# Altium PCB MAGI'sBatteryPowerMega-Python.PcbDoc (part 1 of 3)
Units mil, origin at the board's own origin, x right, y up, seen from the top; angles counter-clockwise.
Board outline 6000 x 4000 mil, 2 copper layers (Top Layer, Bottom Layer); 34 components, 41 nets, 184 pads, 153 vias.
Unrouted connection lines stored in the file: 5.
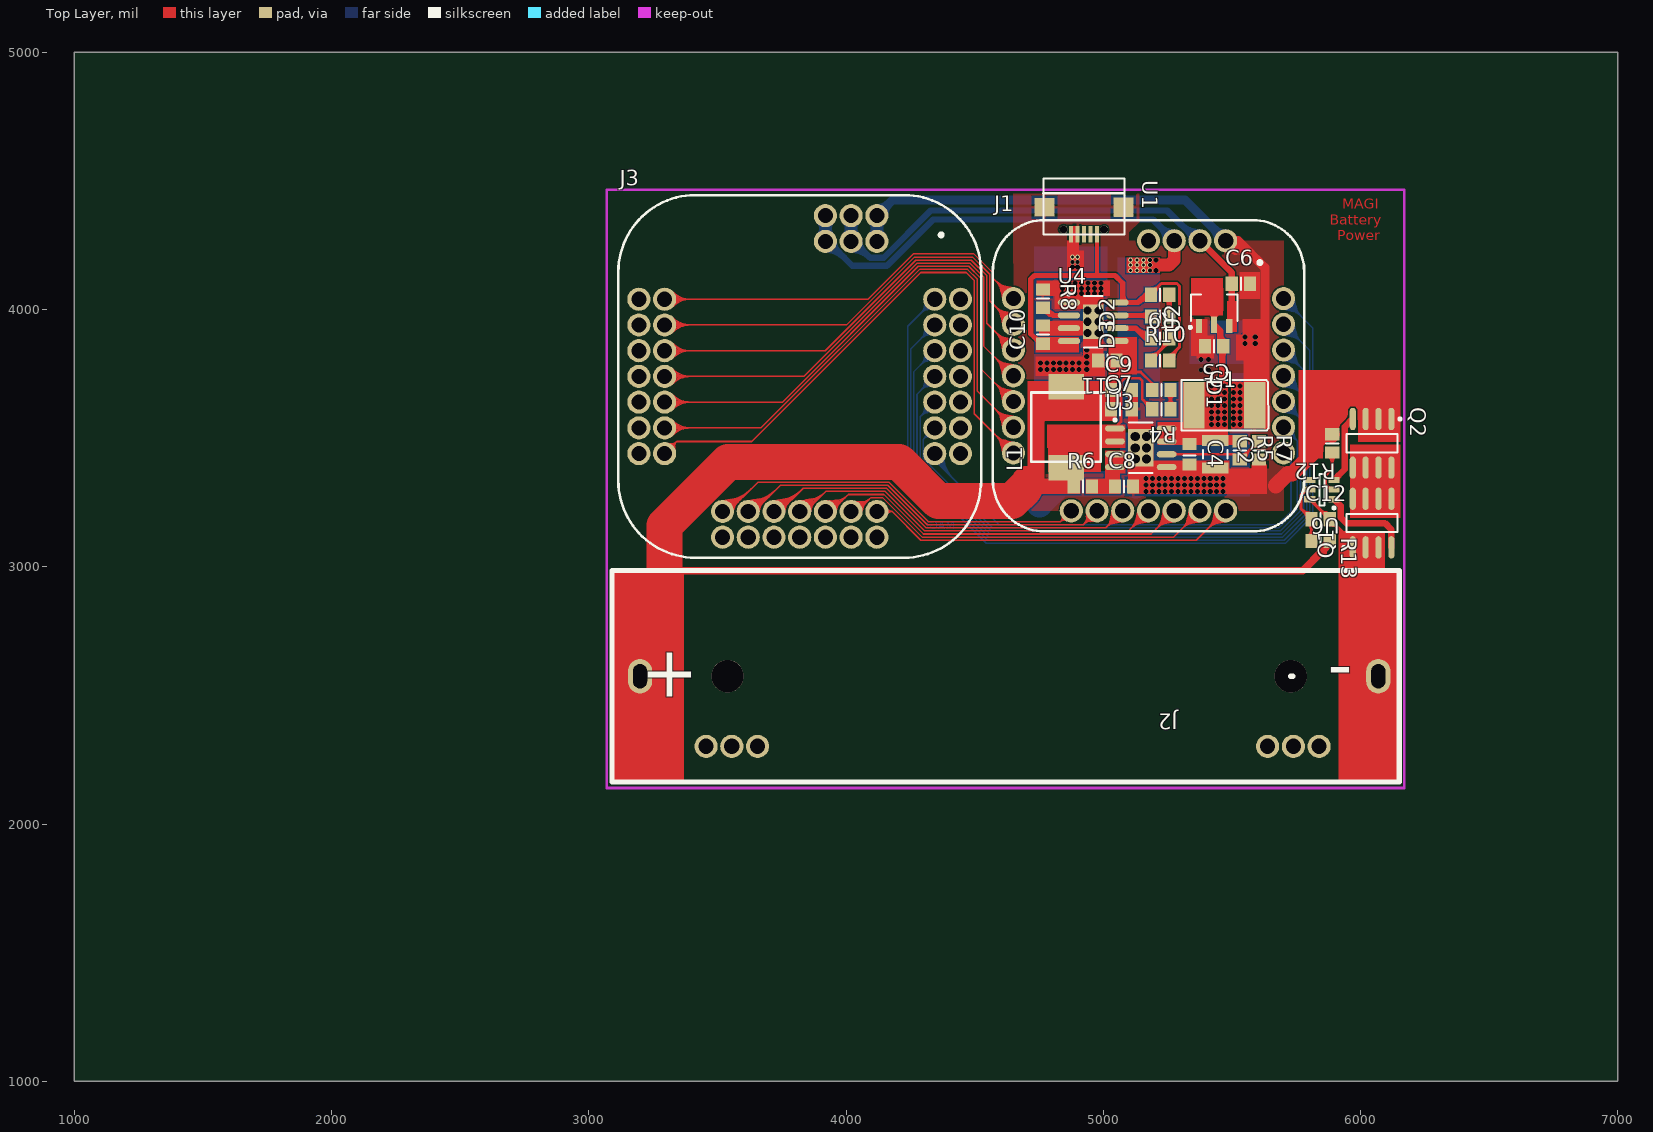
[diagram p0: Top Layer view]
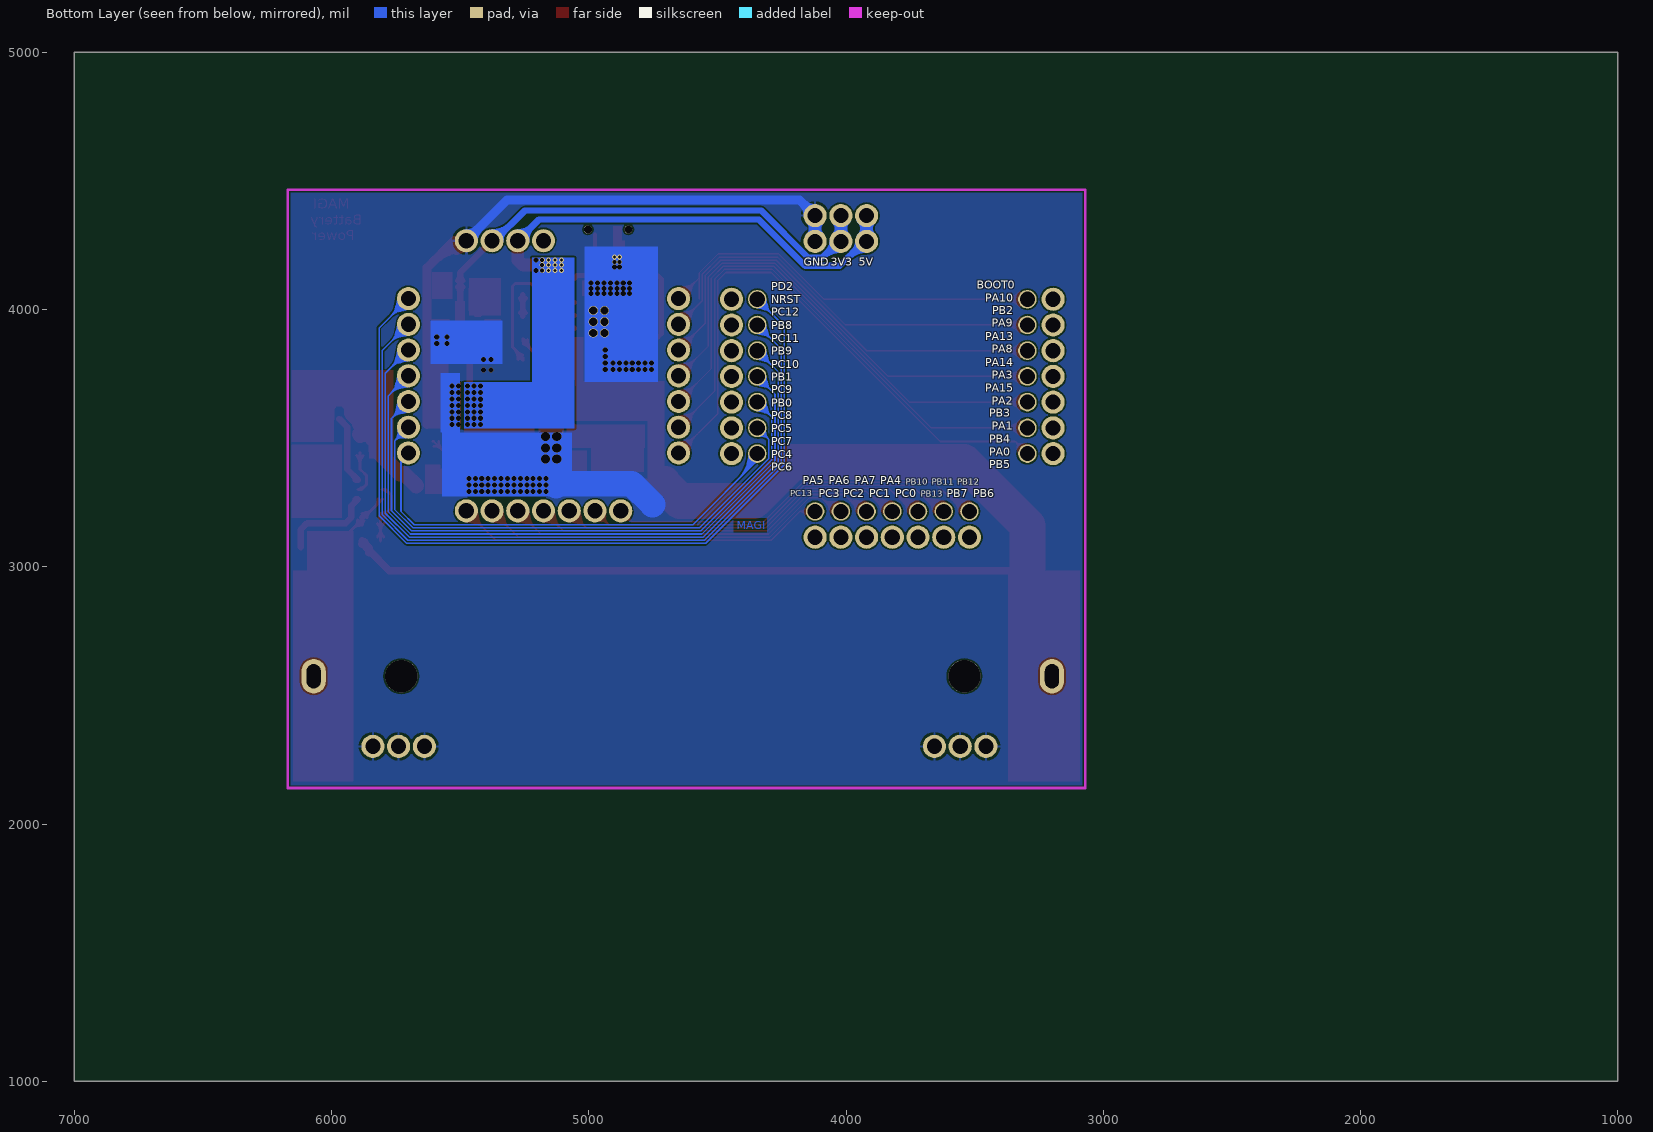
[diagram p1: Bottom Layer view, seen from below]

## Layer stack, top to bottom
Top Solder: solder mask 0.4, Solder Resist, Dk 3.5
Top Layer: signal copper 1.4
Dielectric1: dielectric 12.6, FR-4, Dk 4.8
Bottom Layer: signal copper 1.4
Bottom Solder: solder mask 0.4, Solder Resist, Dk 3.5

## Board outline
1000,1000 7000,1000 7000,5000 1000,5000

## Design rules (kind name [scope] priority, off if disabled: settings)
Clearance [All] p1: gap=6
PolygonConnect [All] p1: connectstyle=Relief reliefconductorwidth=10 reliefentries=4 polygonreliefangle="90 Angle" airgapwidth=10
RoutingVias [All] p1: holewidth=28 width=50 viastyle="Through Hole" minholewidth=28 minwidth=50 maxholewidth=28 maxwidth=50
SolderMaskExpansion [All] p1: expansion=4
Width [All] p1: maxlimit=200 minlimit=6 preferedwidth=30
29 further rules are at their usual default settings.

## Components (designator, comment, footprint, x,y, rotation, side; value= is the part's Value field where it differs from the comment)
C1 "TAN Cap" TAN-D-7343 5470.94,3627.44 r0 top
C2 "22uf" 14-1210 5435.94,3437.44 r270 top
C4 "10uf" 6-0805_N#1 5335.94,3432.44 r270 top
C5 "10uf" 6-0805_N#2 5430.94,3857.44 r180 top
C6 "10uf" 6-0805_N#2 5535,4100 r0 top
C7 "10uf" 6-0805_N#3 5065.94,3612.44 r0 top
C8 "1uf" 6-0805_N#2 5080.94,3312.44 r0 top
C9 "10uf" 6-0805_N#3 5065.94,3687.44 r0 top
C10 "10uf" 6-0805_N#2 4765.94,3902.44 r90 top
C11 "10uf" 6-0805_N#2 5015.94,3802.44 r180 top
C12 "10uf" 6-0805_N#2 5845,3185 r0 top
D1 "LED" 6-0805_N#2 5225.94,3687.44 r0 top
D2 "LED" 6-0805_N#2 5220.94,3972.44 r180 top
D3 "LED" 6-0805_N#2 5220.94,3887.44 r180 top
J1 "MAGI-M8" MAGI-M8 5175.94,3742.44 r0 top
J2 "CON2" 18650 5195,2565 r180 top
J3 "MAGIsBoard-Python" MAGIsBoard-Python 3820,3740 r0 top
L1 "INDUCTOR" 7*7 4845.94,3542.44 r90 top
Q1 "IRF7822" SO-8_N 6045,3170 r90 top
Q2 "IRF7822" SO-8_N 6045,3480 r270 top
R4 "1K" 6-0805_N#2 5225.94,3612.44 r180 top
R5 "316kΩ" 6-0805_N#2 5530.94,3452.44 r270 top
R6 "4.7" 6-0805_N#2 4920.94,3312.44 r0 top
R7 "100kΩ" 6-0805_N#2 5605.94,3452.44 r270 top
R8 "RPROG" 6-0805_N#2 4765.94,4042.44 r270 top
R9 "1K" 6-0805_N#2 5220.94,4057.44 r180 top
R10 "1K" 6-0805_N#2 5220.94,3802.44 r0 top
R12 "000" 6-0805_n 5890,3480 r270 top
R13 "000" 6-0805_n 5845,3100 r0 top
U1 "USB" MicroUSB 4925,4315 r0 top
U2 "HS7333" HS7333 5430.94,4007.44 r90 top
U3 "G5177B" G5177B 5145.94,3462.44 r0 top
U4 "TP4056" TP4056 4960.94,3952.44 r0 top
U6 "DW-01" TPS2513 5850,3300 r180 top

## Footprints (in the part's own frame and the unit in brackets; to place one, negate y for a bottom-side part, rotate by r counter-clockwise, add the part's x,y. Pads: shape width x height; smd on the part's side, far side on the other; paste and mask are expansions set on the pad)
6-0805_N#1 [mm] "Chip Resistor, Body 2.0x1.2mm, IPC Medium Density"
  rect 1.2x1.4 smd: 1(-1.143,0) 2(0.9,0)
  silkscreen extent 0,-0.6 0,0.6, body extent -1.07,-0.7 1.07,0.7, height 0.7
6-0805_N#2 [mm] "Chip Resistor, Body 2.0x1.2mm, IPC Medium Density"
  rect 1.2x1.4 smd: 1(-0.9,0) 2(0.9,0)
  silkscreen extent 0,-0.6 0,0.6, body extent -1.07,-0.7 1.07,0.7, height 0.7
6-0805_N#3 [mm] "Chip Resistor, Body 2.0x1.2mm, IPC Medium Density"
  rect 1.2x1.4 smd: 1(-0.9,0) 2(1.143,0)
  silkscreen extent 0,-0.6 0,0.6, body extent -1.07,-0.7 1.07,0.7, height 0.7
6-0805_n [mm] "Chip Resistor, Body 2.0x1.2mm, IPC Medium Density"
  rect 1.2x1.4 smd: 1(-0.9,0) 2(0.9,0)
  silkscreen extent 0,-0.6 0,0.6, body extent -1.07,-0.7 1.07,0.7, height 0.7
7*7 [mil]
  rect 98.43x137.8 smd: 1(-157.5,-10) 2(157.5,-10)
  silkscreen extent -135,-145 135,125
14-1210 [mm] "Chip Resistor, Body 3.2x2.5mm, IPC High Density"
  rect 1.1x2.6 smd: 1(-1.35,0) 2(1.35,0)
  silkscreen extent -0.4,-1.2 0.4,1.2, body extent -1.68,-1.32 1.68,1.32, height 0.9
18650 [mm]
  round 3.2 hole 3.2: 0(-13.56,-0.24) 0(42.05,-0.24)
  oval 2.4x3.4 hole 1.38 slot 2.4 at 90 deg: 1(50.69,-0.24) 2(-22.21,-0.24)
  silkscreen extent -24.28,-10.69 53.46,10.21
G5177B [mm]
  oval 1.95x0.6 smd: 1(-2.55,1.905) 2(-2.55,0.635) 3(-2.55,-0.635) 4(-2.55,-1.905) 5(2.55,-1.905) 6(2.55,-0.635) 7(2.55,0.635) 8(2.55,1.905)
  rect 2.55x3.71 smd: 9(0,0)
  silkscreen extent -2.67,-2.5 1.17,2.88, body extent -2,-2.5 2,2.5, height 1.65
HS7333 [mm] "SOT89, 3-Leads, Body 4.50x2.50mm, Pitch 1.50mm, Lead Span 4.1mm, IPC Medium Density"
  rect 1.4x0.6 smd: 1(-1.8,1.5) 3(-1.8,-1.5)
  rect 1.6x0.6 smd: 2(-1.7,0)
  Top Layer region: -0.9,0.3 -0.3,0.9 1.9,0.9 2.5,0.3 2.5,-0.3 1.9,-0.9 -0.3,-0.9 -0.9,-0.3
  silkscreen extent -2.07,-2.3 1.3,2.47, body extent -1.3,-2.3 1.3,2.3, height 1.6
MAGI-M8 [mil]
  round 90 hole 59.06: 1(300,525) 2(200,525) 3(100,525) 4(0,525) 8(-525,300) 9(-525,200) 10(-525,100) 11(-525,0) 12(-525,-100) 13(-525,-200) 14(-525,-300) 15(-300,-525) 16(-200,-525) 17(-100,-525) 18(0,-525) 19(100,-525) 20(200,-525) 21(300,-525) 22(525,-300) 23(525,-200) 24(525,-100) 25(525,0) 26(525,100) 27(525,200) 28(525,300)
  silkscreen extent -605,-605 605,430
MAGIsBoard-Python [mil]
  round 90 hole 59.06: 1(300,525) 1(300,625) 2(200,525) 2(200,625) 3(100,525) 3(100,625) 29(-625,300) 30(-625,200) 31(-625,100) 32(-625,0) 33(-625,-100) 34(-625,-200) 35(-625,-300) 36(-300,-625) 37(-200,-625) 38(-100,-625) 39(0,-625) 40(100,-625) 41(200,-625) 42(300,-625) 43(625,-300) 44(625,-200) 45(625,-100) 46(625,0) 47(625,100) 48(625,200) 49(625,300)
  round 90 / inner round 72 / far side round 72 hole 59.06: 8(-525,300) 9(-525,200) 10(-525,100) 11(-525,0) 12(-525,-100) 13(-525,-200) 14(-525,-300) 15(-300,-525) 16(-200,-525) 17(-100,-525) 18(0,-525) 19(100,-525) 20(200,-525) 21(300,-525) 22(525,-300) 23(525,-200) 24(525,-100) 25(525,0) 26(525,100) 27(525,200) 28(525,300)
  silkscreen extent -705,-705 705,705
MicroUSB [mm]
  round 0.8 hole 0.8: 0(-2,-0.1) 0(2,-0.1)
  rect 0.4x1.6 smd: 1(1.3,-0.576) 2(0.65,-0.576) 3(0,-0.576) 4(-0.65,-0.576) 5(-1.3,-0.576)
  rect 2x1.8 smd: 6(-3.9,2.1)
  rect 2x1.9 smd: 7(3.9,2.1)
  silkscreen extent -4,-0.58 4,4.92, body extent -4.1,-0.68 4.1,5.02, height 3
SO-8_N [mm] "SOIC, 8-Leads, Body 4.9x3.9mm, Pitch 1.27mm, IPC Medium Density"
  oval 2.2x0.6 smd: 1(-2.4,1.905) 2(-2.4,0.635) 3(-2.4,-0.635) 4(-2.4,-1.905) 5(2.4,-1.905) 6(2.4,-0.635) 7(2.4,0.635) 8(2.4,1.905)
  silkscreen extent -2.52,-2.5 0.9,2.88, body extent -2,-2.5 2,2.5, height 1.75
TAN-D-7343 [mm]
  rect 2.1x4.6 smd: 1(-3,0) 2(3,0)
  silkscreen extent -4.25,-2.5 4.34,2.5, body extent -3.65,-2.15 3.65,2.15, height 2.9
TP4056 [mm] "SOIC, 8-Leads, Body 4.90x3.90mm, Pitch 1.27mm, Thermal Pad 3.40.2x2.00.2mm, IPC Medium Density"
  oval 2.2x0.6 smd: 1(-2.4,1.905) 2(-2.4,0.635) 3(-2.4,-0.635) 4(-2.4,-1.905) 5(2.4,-1.905) 6(2.4,-0.635) 7(2.4,0.635) 8(2.4,1.905)
  rect 2x3.4 smd: 9(0,0)
  silkscreen extent -2.52,-2.55 0.9,2.88, body extent -2,-2.55 2,2.55, height 1.75
TPS2513 [mm]
  rect 1.1x0.6 smd: 1(-1.2,0.95) 2(-1.2,0) 3(-1.2,-0.95) 4(1.2,-0.95) 5(1.2,0) 6(1.2,0.95)
  silkscreen extent -1.33,-1.55 0.25,1.92, body extent -0.87,-1.52 0.87,1.53, height 1.45

## Part data
C1 C2 C4 C5 C6 C7 C8 C9 C10 C11 C12: library part "CAPACITOR POL", "Capacitor"
J2: "Connector"
Q1 Q2: "HEXFET Power MOSFET"
R4 R5 R6 R7 R8 R9 R10 R12 R13: library part RES1
U6: library part TPS2513

## Free pads (board coordinates)
  round 90 hole 59.06: 1(3456.1,2301.9) 2(3456.1,2301.9) 2(5639.06,2301.9) 3(3556.1,2301.9) 3(5739.06,2301.9) 4(3656.1,2301.9) 4(5839.06,2301.9)

## Via types
v1: diameter 19.68, hole 19.68, Top Layer to Bottom Layer, 125 vias
v2: diameter 19.68, hole 11.81, Top Layer to Bottom Layer, 11 vias
v3: diameter 35.43, hole 35.43, Top Layer to Bottom Layer, 6 vias
v4: diameter 35.43, hole 31.5, Top Layer to Bottom Layer, 6 vias
v5: diameter 19.68, hole 15.75, Top Layer to Bottom Layer, 5 vias

## Nets (pads, with @x,y where several pads share a name; then routed paths per layer and width w, separated by ;. In a path a pad name is that pad's centre, name@x,y a point inside that pad or via, vN(x,y) a via of type N, cw(c..) or ccw(c..) an arc to the next point about the centre after c; other vN are vias at no path point)
3.3V: C6.1 J1.2 J3.2 U2.3 | length 2623
  Top Layer w25: J1.2@5375.94,4267.44 5499.57,4143.82 C6.1@5499.57,4100 5499.57,4000.43 5505,3995 ; 5499.57,4069.21 cw(c5526.42,4069.21) 5507.43,4088.2 ccw(c5526.42,4069.21) 5499.57,4069.21 ; 5499.57,4069.21 ccw(c5472.72,4069.21) 5491.7,4088.2 cw(c5472.72,4069.21) 5499.57,4069.21 ; 5499.57,4130.79 cw(c5472.72,4130.79) 5491.7,4111.8 ccw(c5472.72,4130.79) 5499.57,4130.79 ; 5499.57,4130.79 ccw(c5526.42,4130.79) 5507.43,4111.8 cw(c5526.42,4130.79) 5499.57,4130.79
  Bottom Layer w25: J3.2@4020,4232.5 cw(c4020,4129.42) 4092.89,4202.31 ; J3.2@4020,4265 4030.2,4265 4093.7,4201.5 4146.3,4201.5 4329.8,4385 5248.19,4385 5365.75,4267.44 J1.2@5375.94,4267.44 ; J3.2@4052.5,4265 ccw(c4106.34,4265) 4068.27,4226.93 ; 5303.06,4330.13 ccw(c5375.94,4403.02) 5375.94,4299.94 cw(c5375.94,4403.02) 5303.06,4330.13 ; 5327.67,4305.51 cw(c5289.6,4267.44) 5343.44,4267.44 ccw(c5289.6,4267.44) 5327.67,4305.51
  Bottom Layer w50: J3.2@4005.86,4279.14 ccw(c3971.72,4313.28) 4020,4313.28 ccw(c4068.28,4313.28) J3.2@4034.14,4279.14 ; J3.2@4005.86,4350.86 cw(c3971.72,4316.72) 4020,4316.72 cw(c4068.28,4316.72) J3.2@4034.14,4350.86 ; J3.2@4020,4265 J3.2@4020,4365
5V: C1.1 C2.1 C4.1 C5.1 J1.3 J3.3 R5.1 U2.2 U3.7 U3.8 | length 5456.9
  Top Layer w12: 5420.94,3637.44 5420.94,3665.07 ; v1@5422.12,3681.1 ccw(c5425.21,3690.65) 5432.31,3683.55 ; v1@5424.6,3652.43 cw(c5434.16,3655.52) 5427.06,3662.62 ; 5434.64,3673.21 cw(c5440.02,3666.42) v1@5444.13,3674.06 ; 5435.03,3668.41 cw(c5445.09,3661.31) v1@5445.74,3673.6 ; 5437.18,3691.46 ccw(c5430.06,3701.23) v1@5442.11,3702.15 ; 5439.83,3691.08 ccw(c5432.73,3698.18) v1@5442.29,3701.26 ; v1@5443.75,3680.6 ccw(c5431.24,3698.63) 5452.84,3694.73 ; v1@5444.54,3681.02 ccw(c5436.51,3701.44) 5456.63,3692.68 ; 5454.29,3694.14 ccw(c5448.61,3715.34) v1@5467.62,3704.36 ; 5459.22,3693.74 cw(c5470.94,3682.02) v1@5470.94,3698.6 ; v1@5412.79,3651.25 cw(c5426.44,3651.25) 5416.79,3660.91 ; v1@5412.79,3651.25 cw(c5426.44,3651.25) 5416.79,3660.91 ; v1@5412.79,3651.25 cw(c5426.44,3651.25) 5416.79,3660.91 ; v1@5416.88,3670.37 ccw(c5422.48,3680.12) 5431.6,3673.54 ; v1@5416.88,3670.37 ccw(c5422.48,3680.12) 5431.6,3673.54 ; v1@5416.88,3670.37 ccw(c5422.48,3680.12) 5431.6,3673.54 ; v1@5416.88,3670.37 ccw(c5422.48,3680.12) 5431.6,3673.54 ; v1@5419.02,3654.58 ccw(c5408.05,3673.59) 5429.25,3667.91 ; v1@5419.02,3654.58 ccw(c5408.05,3673.59) 5429.25,3667.91 ; v1@5419.02,3654.58 ccw(c5408.05,3673.59) 5429.25,3667.91 ; v1@5420.35,3681.24 ccw(c5415.29,3713.51) v1@5443.58,3697.17 ; v1@5420.35,3681.24 ccw(c5415.29,3713.51) v1@5443.58,3697.17 ; v1@5420.35,3681.24 ccw(c5415.29,3713.51) v1@5443.58,3697.17 ; v1@5420.35,3681.24 ccw(c5415.29,3713.51) v1@5443.58,3697.17 ; v1@5420.35,3681.24 ccw(c5415.29,3713.51) v1@5443.58,3697.17 ; 5420.95,3665.07 cw(c5442.08,3643.94) v1@5445.5,3673.62 ; 5420.95,3665.07 cw(c5442.08,3643.94) v1@5445.5,3673.62 ; 5420.95,3665.07 cw(c5442.08,3643.94) v1@5445.5,3673.62 ; 5420.94,3665.07 5459.1,3703.23 ; v1@5420.94,3681.28 ccw(c5420.94,3697.56) 5432.45,3686.05 ; v1@5420.94,3681.28 ccw(c5420.94,3697.56) 5432.45,3686.05 ; v1@5420.94,3681.28 ccw(c5420.94,3720.43) 5448.63,3692.75 ; v1@5420.94,3681.28 ccw(c5420.94,3697.56) 5432.45,3686.05 ; v1@5420.94,3681.28 ccw(c5420.94,3697.56) 5432.45,3686.05 ; v1@5420.94,3681.28 ccw(c5420.94,3697.56) 5432.45,3686.05 ; v1@5420.94,3681.28 ccw(c5420.94,3720.43) 5448.63,3692.75 ; v1@5420.94,3681.28 ccw(c5420.94,3697.56) 5432.45,3686.05 ; v1@5420.94,3681.28 ccw(c5420.94,3720.43) 5448.63,3692.75 ; v1@5422.21,3669.38 ccw(c5420.29,3681.63) 5431.02,3675.43 ; v1@5422.21,3669.38 ccw(c5420.29,3681.63) 5431.02,3675.43 ; v1@5422.21,3669.38 ccw(c5420.29,3681.63) 5431.02,3675.43 ; v1@5422.21,3669.38 ccw(c5420.29,3681.63) 5431.02,3675.43 ; v1@5422.21,3669.38 ccw(c5420.29,3681.63) 5431.02,3675.43 ; v1@5422.86,3680.77 ccw(c5429.15,3691.73) v1@5439.39,3684.33 ; v1@5422.86,3680.77 ccw(c5429.15,3691.73) v1@5439.39,3684.33 ; v1@5422.86,3680.77 ccw(c5429.15,3691.73) v1@5439.39,3684.33 ; v1@5422.86,3680.77 ccw(c5429.15,3691.73) v1@5439.39,3684.33 ; v1@5423.5,3657.54 cw(c5452.24,3640.95) v1@5446.6,3673.65 ; v1@5423.5,3657.54 cw(c5452.24,3640.95) v1@5446.6,3673.65 ; v1@5423.5,3657.54 cw(c5452.24,3640.95) v1@5446.6,3673.65 ; v1@5423.5,3657.54 cw(c5452.24,3640.95) v1@5446.6,3673.65 ; v1@5424.27,3675.52 cw(c5443.28,3664.55) 5437.6,3685.75 ; v1@5424.27,3675.52 cw(c5443.28,3664.55) 5437.6,3685.75 ; v1@5424.27,3675.52 cw(c5443.28,3664.55) 5437.6,3685.75 ; v1@5424.79,3651.25 cw(c5467.41,3651.25) v1@5437.27,3681.4 ; v1@5424.79,3651.25 cw(c5443.08,3651.25) 5430.14,3664.19 ; v1@5424.79,3651.25 cw(c5443.08,3651.25) 5430.14,3664.19 ; v1@5424.79,3651.25 cw(c5443.08,3651.25) 5430.14,3664.19 ; v1@5424.79,3651.25 cw(c5443.08,3651.25) 5430.14,3664.19 ; v1@5424.79,3651.25 cw(c5467.41,3651.25) v1@5437.27,3681.4 ; v1@5424.79,3651.25 cw(c5443.08,3651.25) 5430.14,3664.19 ; v1@5424.79,3651.25 cw(c5443.08,3651.25) 5430.14,3664.19 ; v1@5424.79,3651.25 cw(c5467.41,3651.25) v1@5437.27,3681.4 ; v1@5426.21,3679.81 ccw(c5409.88,3708.1) v1@5442.15,3703.04 ; v1@5426.21,3679.81 ccw(c5409.88,3708.1) v1@5442.15,3703.04 ; v1@5426.21,3679.81 ccw(c5409.88,3708.1) v1@5442.15,3703.04 ; v1@5426.21,3679.81 ccw(c5409.88,3708.1) v1@5442.15,3703.04 ; v1@5428.45,3671.1 ccw(c5425.24,3692.81) v1@5442.86,3679.73 ; v1@5428.45,3671.1 ccw(c5425.24,3692.81) v1@5442.86,3679.73 ; v1@5428.45,3671.1 ccw(c5425.24,3692.81) v1@5442.86,3679.73 ; v1@5428.63,3672.02 cw(c5437.31,3665.65) v1@5443.68,3674.34 ; v1@5428.63,3672.02 cw(c5437.31,3665.65) v1@5443.68,3674.34 ; v1@5428.63,3672.02 cw(c5437.31,3665.65) v1@5443.68,3674.34 ; v1@5428.63,3672.02 cw(c5437.31,3665.65) v1@5443.68,3674.34 ; 5430.64,3674.76 ccw(c5402.96,3702.44) v1@5442.1,3702.44 ; 5430.64,3674.76 ccw(c5402.96,3702.44) v1@5442.1,3702.44 ; 5430.64,3674.76 ccw(c5402.96,3702.44) v1@5442.1,3702.44 ; 5430.95,3666.42 ccw(c5421.74,3686.35) v1@5442.34,3678.77 ; 5430.95,3666.42 ccw(c5421.74,3686.35) v1@5442.34,3678.77 ; 5430.95,3666.42 ccw(c5421.74,3686.35) v1@5442.34,3678.77 ; 5435.16,3687.27 cw(c5455.23,3678.38) v1@5447.33,3698.86 ; 5435.16,3687.27 cw(c5455.23,3678.38) v1@5447.33,3698.86 ; 5435.16,3687.27 cw(c5455.23,3678.38) v1@5447.33,3698.86 ; 5435.72,3681.7 cw(c5444.4,3675.34) v1@5450.76,3684.02 ; 5435.72,3681.7 cw(c5444.4,3675.34) v1@5450.76,3684.02 ; 5435.72,3681.7 cw(c5444.4,3675.34) v1@5450.76,3684.02 ; 5435.72,3681.7 cw(c5444.4,3675.34) v1@5450.76,3684.02 ; 5436.31,3679.73 cw(c5446.57,3673.8) v1@5444.56,3685.48 ; 5436.31,3679.73 cw(c5446.57,3673.8) v1@5444.56,3685.48 ; 5436.31,3679.73 cw(c5446.57,3673.8) v1@5444.56,3685.48 ; 5436.31,3679.73 cw(c5446.57,3673.8) v1@5444.56,3685.48 ; 5437.64,3685.79 cw(c5458.84,3680.11) v1@5447.87,3699.11 ; 5437.64,3685.79 cw(c5458.84,3680.11) v1@5447.87,3699.11 ; 5437.64,3685.79 cw(c5458.84,3680.11) v1@5447.87,3699.11 ; v1@5437.88,3678.65 cw(c5450.24,3676.8) 5443.99,3687.62 ; v1@5437.88,3678.65 cw(c5450.24,3676.8) 5443.99,3687.62 ; v1@5437.88,3678.65 cw(c5450.24,3676.8) 5443.99,3687.62 ; v1@5439.36,3672.62 cw(c5448.05,3678.98) 5441.69,3687.66 ; v1@5439.36,3672.62 cw(c5448.05,3678.98) 5441.69,3687.66 ; v1@5439.36,3672.62 cw(c5448.05,3678.98) 5441.69,3687.66 ; v1@5439.36,3672.62 cw(c5448.05,3678.98) 5441.69,3687.66 ; v1@5440.05,3684.93 ccw(c5433.43,3694.02) v1@5442.76,3700.3 ; v1@5440.05,3684.93 ccw(c5433.43,3694.02) v1@5442.76,3700.3 ; v1@5440.05,3684.93 ccw(c5433.43,3694.02) v1@5442.76,3700.3 ; v1@5442.1,3702.44 cw(c5425.83,3702.44) 5437.34,3690.93 ccw(c5425.83,3702.44) v1@5442.1,3702.44 ; 5447.96,3692.36 ccw(c5441.76,3703.1) v1@5454,3701.18 ; 5447.96,3692.36 ccw(c5441.76,3703.1) v1@5454,3701.18 ; 5447.96,3692.36 ccw(c5441.76,3703.1) v1@5454,3701.18 ; 5447.96,3692.36 ccw(c5441.76,3703.1) v1@5454,3701.18 ; v1@5449.05,3679.71 cw(c5457.73,3686.07) v1@5451.37,3694.76 ; v1@5449.05,3679.71 cw(c5457.73,3686.07) v1@5451.37,3694.76 ; v1@5449.05,3679.71 cw(c5457.73,3686.07) v1@5451.37,3694.76 ; v1@5449.05,3679.71 cw(c5457.73,3686.07) v1@5451.37,3694.76 ; v1@5449.74,3676.87 cw(c5481.71,3672.08) v1@5465.55,3700.07 ; v1@5449.74,3676.87 cw(c5481.71,3672.08) v1@5465.55,3700.07 ; v1@5449.74,3676.87 cw(c5481.71,3672.08) v1@5465.55,3700.07 ; 5450.12,3692.26 ccw(c5443.77,3700.98) v1@5452.71,3706.99 ; 5450.12,3692.26 ccw(c5443.77,3700.98) v1@5452.71,3706.99 ; 5450.12,3692.26 ccw(c5443.77,3700.98) v1@5452.71,3706.99 ; 5459.1,3703.23 ccw(c5481.89,3680.44) 5449.77,3677.76 cw(c5481.89,3680.44) 5459.1,3703.23 ; v1@5470.94,3698.6 ccw(c5470.94,3658.84) 5442.83,3686.95 cw(c5470.94,3658.84) v1@5470.94,3698.6 ; v1@5424.53,3676.06 cw(c5445.01,3668.16) 5436.11,3688.23 ccw(c5445.01,3668.16) v1@5424.53,3676.06
  Top Layer w25: U2.2@5430.94,3940.51 5455.69,3915.77 5455.69,3889.01 ; 5458.01,3701.67 ccw(c5466.98,3717.22) 5471.63,3699.87 cw(c5467.28,3716.13) 5458.86,3701.56 ; 5455.69,3889.01 ccw(c5472.97,3889.01) C5.1@5468.96,3872.2 ; 5455.69,3889.01 cw(c5444.15,3877.47) C5.1@5457.37,3867.9 ; 5455.69,3889.01 ccw(c5472.97,3889.01) C5.1@5468.96,3872.2 ; 5455.69,3889.01 cw(c5444.15,3877.47) C5.1@5457.37,3867.9 ; 5455.69,3889.01 cw(c5444.15,3877.47) C5.1@5457.37,3867.9 ; 5455.69,3889.01 ccw(c5472.97,3889.01) C5.1@5468.96,3872.2 ; 5455.69,3889.01 5466.38,3878.32 C5.1@5466.38,3857.44 5463.39,3854.45 v1@5463.39,3698.94 ; v1@5463.39,3698.94 ccw(c5448.2,3683.76) 5445.63,3705.08 cw(c5448.2,3683.76) v1@5463.39,3698.94 ; v1@5463.39,3698.94 v1@5464.29,3698.04 ; 5463.39,3819.43 cw(c5500.45,3819.43) C5.1@5474.24,3845.64 ; 5463.39,3819.43 cw(c5500.45,3819.43) C5.1@5474.24,3845.64 ; 5463.39,3819.43 cw(c5500.45,3819.43) C5.1@5474.24,3845.64 ; v1@5464.29,3698.04 ccw(c5447.16,3680.91) 5445.79,3705.09 cw(c5447.16,3680.91) v1@5464.29,3698.04 ; v1@5465.62,3696.71 cw(c5446.35,3677.44) v1@5473.6,3677.44 ; v1@5465.62,3696.71 cw(c5446.35,3677.44) v1@5473.6,3677.44 ; v1@5465.62,3696.71 cw(c5446.35,3677.44) v1@5473.6,3677.44 ; v1@5465.62,3696.71 cw(c5446.35,3677.44) v1@5473.6,3677.44 ; 5463.39,3714.27 ccw(c5482.78,3714.27) 5469.07,3700.56 cw(c5482.78,3714.27) 5463.39,3714.27 ; v1@5468.38,3703.13 ccw(c5486.84,3698.18) 5470.29,3688.63 cw(c5486.84,3698.18) v1@5468.38,3703.13
  Top Layer w50: v5(5180.94,4172.44) 5255.94,4172.44 5275.94,4192.44 J1.3@5275.94,4267.44
  Bottom Layer w25: J3.3@3920,4232.5 cw(c3920,4129.42) 3992.89,4202.31 ; J3.3@3920,4265 3930.2,4265 4024.7,4170.5 4159.14,4170.5 4338.64,4350 5193.39,4350 J1.3@5275.94,4267.44 ; J3.3@3952.5,4265 ccw(c4006.34,4265) 3968.27,4226.93 ; 5220.46,4322.92 cw(c5164.98,4267.44) 5243.44,4267.44 ccw(c5164.98,4267.44) 5220.46,4322.92 ; 5220.46,4322.92 ccw(c5275.94,4378.4) 5275.94,4299.94 cw(c5275.94,4378.4) 5220.46,4322.92
  Bottom Layer w50: J3.3@3905.86,4279.14 ccw(c3871.72,4313.28) 3920,4313.28 ccw(c3968.28,4313.28) J3.3@3934.14,4279.14 ; J3.3@3905.86,4350.86 cw(c3871.72,4316.72) 3920,4316.72 cw(c3968.28,4316.72) J3.3@3934.14,4350.86 ; J3.3@3920,4265 J3.3@3920,4365
  other v1: 5420.94,3552.44 5445.94,3552.44 5470.94,3552.44 5420.94,3577.44 5445.94,3577.44 5470.94,3577.44 5420.94,3602.44 5445.94,3602.44 5470.94,3602.44 5420.94,3627.44 5445.94,3627.44 5470.94,3627.44 5420.94,3651.25 5445.94,3652.44 5470.94,3652.44 5420.94,3677.44 5445.94,3677.44 5470.94,3677.44 5420.94,3702.44 5445.94,3702.44 5470.94,3702.44 5205.94,4152.44 5205.94,4192.44
  other v2: 5105.94,4152.44 5130.94,4152.44 5155.94,4152.44 5105.94,4172.44 5130.94,4172.44 5155.94,4172.44 5105.94,4192.44 5130.94,4192.44 5155.94,4192.44
  other v5: 5180.94,4152.44 5180.94,4192.44
A0: J1.22 J3.22 | length 2337.5
  Bottom Layer w6: J3.22@4342,3440 ccw(c4398.41,3440) 4358.52,3400.11 ; J3.22@4345,3407 cw(c4345,3390.99) 4356.32,3402.31 ; J3.22@4345,3440 4345,3413.63 4595.19,3163.44 5678.44,3163.44 5730,3215 5730,3413.39 J1.22@5700.94,3442.44 ; J3.22@4348,3440 ccw(c4418.9,3440) 4368.77,3389.87 ; J3.22@4354,3440 ccw(c4439.38,3440) 4379.01,3379.62 ; J3.22@4360,3440 ccw(c4459.87,3440) 4389.25,3369.38 ; J3.22@4366,3440 ccw(c4480.36,3440) 4399.49,3359.14 ; J3.22@4372,3440 ccw(c4500.84,3440) 4409.74,3348.9 ; J3.22@4378,3440 ccw(c4521.33,3440) 4419.98,3338.65
A1: J1.23 J3.23 | length 2997.8
  Bottom Layer w6: J3.23@4345,3540 4300,3495 ; J1.23@5700.94,3542.44 5754.94,3488.44 ; 4300,3495 cw(c4331.72,3463.28) 4339.37,3507.48 ccw(c4331.72,3463.28) 4300,3495 ; 4300,3495 ccw(c4268.28,3526.72) 4312.48,3534.37 cw(c4268.28,3526.72) 4300,3495 ; 4300,3495 4300,3421.36 4569.92,3151.44 5683.41,3151.44 5754.94,3222.97 5754.94,3488.44 ; 4308.18,3503.18 cw(c4334.14,3477.23) 4340.4,3513.4 ccw(c4334.14,3477.23) 4308.18,3503.18 ; 4308.18,3503.18 ccw(c4282.23,3529.14) 4318.4,3535.4 cw(c4282.23,3529.14) 4308.18,3503.18 ; 4316.37,3511.37 cw(c4336.55,3491.18) 4341.42,3519.31 ccw(c4336.55,3491.18) 4316.37,3511.37 ; 4316.37,3511.37 ccw(c4296.18,3531.55) 4324.31,3536.42 cw(c4296.18,3531.55) 4316.37,3511.37 ; 5739.51,3503.87 cw(c5763.97,3528.33) 5730.22,3535.89 ccw(c5763.97,3528.33) 5739.51,3503.87 ; 5739.51,3503.87 ccw(c5715.06,3479.41) 5707.5,3513.17 cw(c5715.06,3479.41) 5739.51,3503.87 ; 5747.23,3496.16 cw(c5776.58,3525.51) 5736.08,3534.58 ccw(c5776.58,3525.51) 5747.23,3496.16 ; 5747.23,3496.16 ccw(c5717.88,3466.81) 5708.81,3507.31 cw(c5717.88,3466.81) 5747.23,3496.16 ; 5754.94,3488.44 cw(c5789.18,3522.68) 5741.93,3533.26 ccw(c5789.18,3522.68) 5754.94,3488.44 ; 5754.94,3488.44 ccw(c5720.7,3454.2) 5710.12,3501.46 cw(c5720.7,3454.2) 5754.94,3488.44
A2: J1.24 J3.24 | length 4760.2
  Bottom Layer w6: 4302.27,3602.33 cw(c4356.38,3588.35) J3.24@4344.35,3642.93 ; 4304.71,3611.79 cw(c4354.02,3599.05) J3.24@4343.06,3648.79 ; 4307.16,3621.26 cw(c4351.66,3609.76) J3.24@4341.77,3654.65 ; 4307.33,3597.27 ccw(c4293.35,3651.38) J3.24@4347.93,3639.35 ; 4309.6,3630.72 cw(c4349.3,3620.46) J3.24@4340.48,3660.51 ; 4316.79,3599.71 ccw(c4304.05,3649.02) J3.24@4353.79,3638.06 ; 4326.26,3602.16 ccw(c4314.76,3646.66) J3.24@4359.65,3636.77 ; 4335.72,3604.6 ccw(c4325.46,3644.3) J3.24@4365.51,3635.48 ; J3.24@4345,3640 4288,3583 4288,3416.39 4564.95,3139.44 5688.38,3139.44 5766.94,3218 5766.94,3576.44 ; J1.24@5678.45,3634.07 ccw(c5733.94,3654.72) 5722.09,3596.72 ; J1.24@5684.08,3636.16 ccw(c5745.88,3659.17) 5732.68,3594.55 ; J1.24@5689.7,3638.26 ccw(c5757.83,3663.61) 5743.28,3592.39 ; J1.24@5700.94,3642.44 5766.94,3576.44 ; J1.24@5705.13,3653.69 cw(c5679.77,3585.56) 5751,3600.11 ; J1.24@5707.22,3659.31 cw(c5684.22,3597.5) 5748.83,3610.7 ; J1.24@5709.32,3664.93 cw(c5688.67,3609.45) 5746.67,3621.3 ; 4288.67,3583.67 cw(c4345,3527.33) 4345,3607 ccw(c4345,3527.33) 4288.67,3583.67 ; 4288.67,3583.67 ccw(c4232.33,3640) 4312,3640 cw(c4232.33,3640) 4288.67,3583.67 ; 4298.91,3593.91 cw(c4345,3547.82) 4345,3613 ccw(c4345,3547.82) 4298.91,3593.91 ; 4298.91,3593.91 ccw(c4252.82,3640) 4318,3640 cw(c4252.82,3640) 4298.91,3593.91 ; 4309.15,3604.15 cw(c4345,3568.3) 4345,3619 ccw(c4345,3568.3) 4309.15,3604.15 ; 4309.15,3604.15 ccw(c4273.3,3640) 4324,3640 cw(c4273.3,3640) 4309.15,3604.15 ; 4319.39,3614.39 cw(c4345,3588.79) 4345,3625 ccw(c4345,3588.79) 4319.39,3614.39 ; 4319.39,3614.39 ccw(c4293.79,3640) 4330,3640 cw(c4293.79,3640) 4319.39,3614.39 ; 5738.66,3604.73 cw(c5772.08,3638.15) 5724.9,3640.99 ccw(c5772.08,3638.15) 5738.66,3604.73 ; 5738.66,3604.73 ccw(c5705.24,3571.31) 5702.39,3618.48 cw(c5705.24,3571.31) 5738.66,3604.73 ; 5748.09,3595.3 cw(c5789.86,3637.07) 5730.89,3640.63 ccw(c5789.86,3637.07) 5748.09,3595.3 ; 5748.09,3595.3 ccw(c5706.31,3553.53) 5702.75,3612.5 cw(c5706.31,3553.53) 5748.09,3595.3 ; 5757.51,3585.87 cw(c5807.64,3636) 5736.88,3640.27 ccw(c5807.64,3636) 5757.51,3585.87 ; 5757.51,3585.87 ccw(c5707.39,3535.74) 5703.11,3606.51 cw(c5707.39,3535.74) 5757.51,3585.87 ; 5766.94,3576.44 cw(c5825.42,3634.93) 5742.87,3639.91 ccw(c5825.42,3634.93) 5766.94,3576.44 ; 5766.94,3576.44 ccw(c5708.46,3517.96) 5703.48,3600.52 cw(c5708.46,3517.96) 5766.94,3576.44
A3: J1.25 J3.25 | length 5613.6
  Bottom Layer w6: 4302.27,3702.33 cw(c4356.38,3688.35) J3.25@4344.35,3742.93 ; 4304.71,3711.79 cw(c4354.02,3699.05) J3.25@4343.06,3748.79 ; 4307.16,3721.26 cw(c4351.66,3709.76) J3.25@4341.77,3754.65 ; 4307.33,3697.27 ccw(c4293.35,3751.38) J3.25@4347.93,3739.35 ; 4309.6,3730.72 cw(c4349.3,3720.46) J3.25@4340.48,3760.51 ; 4316.79,3699.71 ccw(c4304.05,3749.02) J3.25@4353.79,3738.06 ; 4326.26,3702.16 ccw(c4314.76,3746.66) J3.25@4359.65,3736.77 ; 4335.72,3704.6 ccw(c4325.46,3744.3) J3.25@4365.51,3735.48 ; J3.25@4345,3740 4276,3671 4276,3411.42 4559.98,3127.44 5693.35,3127.44 5778.94,3213.03 5778.94,3664.44 J1.25@5700.94,3742.44 ; J1.25@5672.31,3733.48 ccw(c5721.75,3748.95) 5710.85,3698.31 ; J1.25@5678.04,3735.27 ccw(c5733.04,3752.48) 5720.92,3696.14 ; J1.25@5683.77,3737.07 ccw(c5744.33,3756.01) 5730.98,3693.98 ; J1.25@5689.04,3740.91 ccw(c5737.37,3747.13) 5724.76,3700.06 ; J1.25@5689.49,3738.86 ccw(c5755.61,3759.55) 5741.04,3691.81 ; J1.25@5694.99,3741.68 ccw(c5746.97,3748.36) 5733.41,3697.74 ; J1.25@5701.71,3748.39 cw(c5695.02,3696.42) 5745.64,3709.98 ; J1.25@5702.48,3754.34 cw(c5696.26,3706.01) 5743.33,3718.63 ; J1.25@5704.53,3753.89 cw(c5683.84,3687.77) 5751.57,3702.35 ; J1.25@5706.32,3759.62 cw(c5687.37,3699.06) 5749.41,3712.41 ; J1.25@5708.11,3765.35 cw(c5690.9,3710.35) 5747.24,3722.47 ; J1.25@5709.9,3771.07 cw(c5694.44,3721.63) 5745.08,3732.53 ; 5742.05,3695.43 cw(c5756.57,3749.6) J1.25@5700.94,3742.44 ; 5747.96,3701.33 ccw(c5693.79,3686.82) J1.25@5700.94,3742.44 ; 4288.67,3683.67 cw(c4345,3627.33) 4345,3707 ccw(c4345,3627.33) 4288.67,3683.67 ; 4288.67,3683.67 ccw(c4232.33,3740) 4312,3740 cw(c4232.33,3740) 4288.67,3683.67 ; 4298.91,3693.91 cw(c4345,3647.82) 4345,3713 ccw(c4345,3647.82) 4298.91,3693.91 ; 4298.91,3693.91 ccw(c4252.82,3740) 4318,3740 cw(c4252.82,3740) 4298.91,3693.91 ; 4309.15,3704.15 cw(c4345,3668.3) 4345,3719 ccw(c4345,3668.3) 4309.15,3704.15 ; 4309.15,3704.15 ccw(c4273.3,3740) 4324,3740 cw(c4273.3,3740) 4309.15,3704.15 ; 4319.39,3714.39 cw(c4345,3688.79) 4345,3725 ccw(c4345,3688.79) 4319.39,3714.39 ; 4319.39,3714.39 ccw(c4293.79,3740) 4330,3740 cw(c4293.79,3740) 4319.39,3714.39 ; 5741.92,3701.47 cw(c5782.89,3742.44) 5724.94,3742.44 ccw(c5782.89,3742.44) 5741.92,3701.47 ; 5741.92,3701.47 ccw(c5700.94,3660.5) 5700.94,3718.44 cw(c5700.94,3660.5) 5741.92,3701.47 ; 5752.16,3691.23 cw(c5803.37,3742.44) 5730.94,3742.44 ccw(c5803.37,3742.44) 5752.16,3691.23 ; 5752.16,3691.23 ccw(c5700.94,3640.01) 5700.94,3712.44 cw(c5700.94,3640.01) 5752.16,3691.23 ; 5762.4,3680.99 cw(c5823.86,3742.44) 5736.94,3742.44 ccw(c5823.86,3742.44) 5762.4,3680.99 ; 5762.4,3680.99 ccw(c5700.94,3619.53) 5700.94,3706.44 cw(c5700.94,3619.53) 5762.4,3680.99 ; 5772.64,3670.74 cw(c5844.34,3742.44) 5742.94,3742.44 ccw(c5844.34,3742.44) 5772.64,3670.74 ; 5772.64,3670.74 ccw(c5700.94,3599.04) 5700.94,3700.44 cw(c5700.94,3599.04) 5772.64,3670.74
A4: J1.26 J3.26 | length 5863.3
  Bottom Layer w6: 4302.27,3802.33 cw(c4356.38,3788.35) J3.26@4344.35,3842.93 ; 4304.71,3811.79 cw(c4354.02,3799.05) J3.26@4343.06,3848.79 ; 4307.16,3821.26 cw(c4351.66,3809.76) J3.26@4341.77,3854.65 ; 4307.33,3797.27 ccw(c4293.35,3851.38) J3.26@4347.93,3839.35 ; 4309.6,3830.72 cw(c4349.3,3820.46) J3.26@4340.48,3860.51 ; 4316.79,3799.71 ccw(c4304.05,3849.02) J3.26@4353.79,3838.06 ; 4326.26,3802.16 ccw(c4314.76,3846.66) J3.26@4359.65,3836.77 ; 4335.72,3804.6 ccw(c4325.46,3844.3) J3.26@4365.51,3835.48 ; J3.26@4345,3840 4264,3759 4264,3406.45 4555.01,3115.44 5698.32,3115.44 5790.94,3208.06 5790.94,3752.44 J1.26@5700.94,3842.44 ; J1.26@5672.31,3833.48 ccw(c5721.75,3848.95) 5710.85,3798.31 ; J1.26@5678.04,3835.27 ccw(c5733.04,3852.48) 5720.92,3796.14 ; J1.26@5683.77,3837.07 ccw(c5744.33,3856.01) 5730.98,3793.98 ; J1.26@5689.04,3840.91 ccw(c5737.37,3847.13) 5724.76,3800.06 ; J1.26@5689.49,3838.86 ccw(c5755.61,3859.55) 5741.04,3791.81 ; J1.26@5694.99,3841.68 ccw(c5746.97,3848.36) 5733.41,3797.74 ; J1.26@5701.71,3848.39 cw(c5695.02,3796.42) 5745.64,3809.98 ; J1.26@5702.48,3854.34 cw(c5696.26,3806.01) 5743.33,3818.63 ; J1.26@5704.53,3853.89 cw(c5683.84,3787.77) 5751.57,3802.35 ; J1.26@5706.32,3859.62 cw(c5687.37,3799.06) 5749.41,3812.41 ; J1.26@5708.11,3865.35 cw(c5690.9,3810.35) 5747.24,3822.47 ; J1.26@5709.9,3871.07 cw(c5694.44,3821.63) 5745.08,3832.53 ; 5742.05,3795.43 cw(c5756.57,3849.6) J1.26@5700.94,3842.44 ; 5747.96,3801.33 ccw(c5693.79,3786.82) J1.26@5700.94,3842.44 ; 4288.67,3783.67 cw(c4345,3727.33) 4345,3807 ccw(c4345,3727.33) 4288.67,3783.67 ; 4288.67,3783.67 ccw(c4232.33,3840) 4312,3840 cw(c4232.33,3840) 4288.67,3783.67 ; 4298.91,3793.91 cw(c4345,3747.82) 4345,3813 ccw(c4345,3747.82) 4298.91,3793.91 ; 4298.91,3793.91 ccw(c4252.82,3840) 4318,3840 cw(c4252.82,3840) 4298.91,3793.91 ; 4309.15,3804.15 cw(c4345,3768.3) 4345,3819 ccw(c4345,3768.3) 4309.15,3804.15 ; 4309.15,3804.15 ccw(c4273.3,3840) 4324,3840 cw(c4273.3,3840) 4309.15,3804.15 ; 4319.39,3814.39 cw(c4345,3788.79) 4345,3825 ccw(c4345,3788.79) 4319.39,3814.39 ; 4319.39,3814.39 ccw(c4293.79,3840) 4330,3840 cw(c4293.79,3840) 4319.39,3814.39 ; 5741.92,3801.47 cw(c5782.89,3842.44) 5724.94,3842.44 ccw(c5782.89,3842.44) 5741.92,3801.47 ; 5741.92,3801.47 ccw(c5700.94,3760.5) 5700.94,3818.44 cw(c5700.94,3760.5) 5741.92,3801.47 ; 5752.16,3791.23 cw(c5803.37,3842.44) 5730.94,3842.44 ccw(c5803.37,3842.44) 5752.16,3791.23 ; 5752.16,3791.23 ccw(c5700.94,3740.01) 5700.94,3812.44 cw(c5700.94,3740.01) 5752.16,3791.23 ; 5762.4,3780.99 cw(c5823.86,3842.44) 5736.94,3842.44 ccw(c5823.86,3842.44) 5762.4,3780.99 ; 5762.4,3780.99 ccw(c5700.94,3719.53) 5700.94,3806.44 cw(c5700.94,3719.53) 5762.4,3780.99 ; 5772.64,3770.74 cw(c5844.34,3842.44) 5742.94,3842.44 ccw(c5844.34,3842.44) 5772.64,3770.74 ; 5772.64,3770.74 ccw(c5700.94,3699.04) 5700.94,3800.44 cw(c5700.94,3699.04) 5772.64,3770.74
A5: J1.27 J3.27 | length 6113
  Bottom Layer w6: 4302.27,3902.33 cw(c4356.38,3888.35) J3.27@4344.35,3942.93 ; 4304.71,3911.79 cw(c4354.02,3899.05) J3.27@4343.06,3948.79 ; 4307.16,3921.26 cw(c4351.66,3909.76) J3.27@4341.77,3954.65 ; 4307.33,3897.27 ccw(c4293.35,3951.38) J3.27@4347.93,3939.35 ; 4309.6,3930.72 cw(c4349.3,3920.46) J3.27@4340.48,3960.51 ; 4316.79,3899.71 ccw(c4304.05,3949.02) J3.27@4353.79,3938.06 ; 4326.26,3902.16 ccw(c4314.76,3946.66) J3.27@4359.65,3936.77 ; 4335.72,3904.6 ccw(c4325.46,3944.3) J3.27@4365.51,3935.48 ; J3.27@4345,3940 4252,3847 4252,3401.48 4550.04,3103.44 5703.29,3103.44 5802.94,3203.09 5802.94,3840.44 J1.27@5700.94,3942.44 ; J1.27@5672.31,3933.48 ccw(c5721.75,3948.95) 5710.85,3898.31 ; J1.27@5678.04,3935.27 ccw(c5733.04,3952.48) 5720.92,3896.14 ; J1.27@5683.77,3937.07 ccw(c5744.33,3956.01) 5730.98,3893.98 ; J1.27@5689.04,3940.91 ccw(c5737.37,3947.13) 5724.76,3900.06 ; J1.27@5689.49,3938.86 ccw(c5755.61,3959.55) 5741.04,3891.81 ; J1.27@5694.99,3941.68 ccw(c5746.97,3948.36) 5733.41,3897.74 ; J1.27@5701.71,3948.39 cw(c5695.02,3896.42) 5745.64,3909.98 ; J1.27@5702.48,3954.34 cw(c5696.26,3906.01) 5743.33,3918.63 ; J1.27@5704.53,3953.89 cw(c5683.84,3887.77) 5751.57,3902.35 ; J1.27@5706.32,3959.62 cw(c5687.37,3899.06) 5749.41,3912.41 ; J1.27@5708.11,3965.35 cw(c5690.9,3910.35) 5747.24,3922.47 ; J1.27@5709.9,3971.07 cw(c5694.44,3921.63) 5745.08,3932.53 ; 5742.05,3895.43 cw(c5756.57,3949.6) J1.27@5700.94,3942.44 ; 5747.96,3901.33 ccw(c5693.79,3886.82) J1.27@5700.94,3942.44 ; 4288.67,3883.67 cw(c4345,3827.33) 4345,3907 ccw(c4345,3827.33) 4288.67,3883.67 ; 4288.67,3883.67 ccw(c4232.33,3940) 4312,3940 cw(c4232.33,3940) 4288.67,3883.67 ; 4298.91,3893.91 cw(c4345,3847.82) 4345,3913 ccw(c4345,3847.82) 4298.91,3893.91 ; 4298.91,3893.91 ccw(c4252.82,3940) 4318,3940 cw(c4252.82,3940) 4298.91,3893.91 ; 4309.15,3904.15 cw(c4345,3868.3) 4345,3919 ccw(c4345,3868.3) 4309.15,3904.15 ; 4309.15,3904.15 ccw(c4273.3,3940) 4324,3940 cw(c4273.3,3940) 4309.15,3904.15 ; 4319.39,3914.39 cw(c4345,3888.79) 4345,3925 ccw(c4345,3888.79) 4319.39,3914.39 ; 4319.39,3914.39 ccw(c4293.79,3940) 4330,3940 cw(c4293.79,3940) 4319.39,3914.39 ; 5741.92,3901.47 cw(c5782.89,3942.44) 5724.94,3942.44 ccw(c5782.89,3942.44) 5741.92,3901.47 ; 5741.92,3901.47 ccw(c5700.94,3860.5) 5700.94,3918.44 cw(c5700.94,3860.5) 5741.92,3901.47 ; 5752.16,3891.23 cw(c5803.37,3942.44) 5730.94,3942.44 ccw(c5803.37,3942.44) 5752.16,3891.23 ; 5752.16,3891.23 ccw(c5700.94,3840.01) 5700.94,3912.44 cw(c5700.94,3840.01) 5752.16,3891.23 ; 5762.4,3880.99 cw(c5823.86,3942.44) 5736.94,3942.44 ccw(c5823.86,3942.44) 5762.4,3880.99 ; 5762.4,3880.99 ccw(c5700.94,3819.53) 5700.94,3906.44 cw(c5700.94,3819.53) 5762.4,3880.99 ; 5772.64,3870.74 cw(c5844.34,3942.44) 5742.94,3942.44 ccw(c5844.34,3942.44) 5772.64,3870.74 ; 5772.64,3870.74 ccw(c5700.94,3799.04) 5700.94,3900.44 cw(c5700.94,3799.04) 5772.64,3870.74
BAT: C7.1 C9.1 C11.1 D1.1 J2.1 L1.2 R6.1 R13.2 U4.5 | length 5286.4
  Top Layer w12: 5090.94,3757.44 5145.44,3757.44
  Top Layer w30: 3295,2985 5775.45,2985 5854.19,3063.74 5854.19,3073.76 R13.2@5880.43,3100 ; 5854.19,3054.43 cw(c5887.86,3054.43) R13.2@5881.95,3087.57 ; 5861.42,3070.97 ccw(c5836.33,3096.06) R13.2@5871.81,3096.06 ; 5861.42,3070.97 ccw(c5836.33,3096.06) R13.2@5871.81,3096.06 ; 5861.42,3070.97 ccw(c5836.33,3096.06) R13.2@5871.81,3096.06 ; 5861.42,3070.97 ccw(c5836.33,3096.06) R13.2@5871.81,3096.06 ; R13.2@5858.99,3078.56 cw(c5880.43,3057.12) 5880.43,3087.44 ccw(c5880.43,3057.12) R13.2@5858.99,3078.56
  Top Layer w50: 4705.94,3342.44 4745.94,3382.44 4745.94,3571.94 4750.94,3576.94 4750.94,3692.44
  Top Layer w100: 4694.44,3304.44 4694.44,3337.44 4699.44,3342.44 4705.94,3342.44
  Top Layer w140: 3295,2775 3295,2985 3295,3161.12 3541.88,3408 4205.88,3408 4358.88,3255 4645,3255 4694.44,3304.44